# Altium PCB module_tester_v2.0.PcbDoc
Units mil, origin at the board's own origin, x right, y up, seen from the top; angles counter-clockwise.
Board outline 3671.45 x 2765.94 mil, 2 copper layers (Top Layer, Bottom Layer); 104 components, 83 nets, 395 pads, 151 vias.
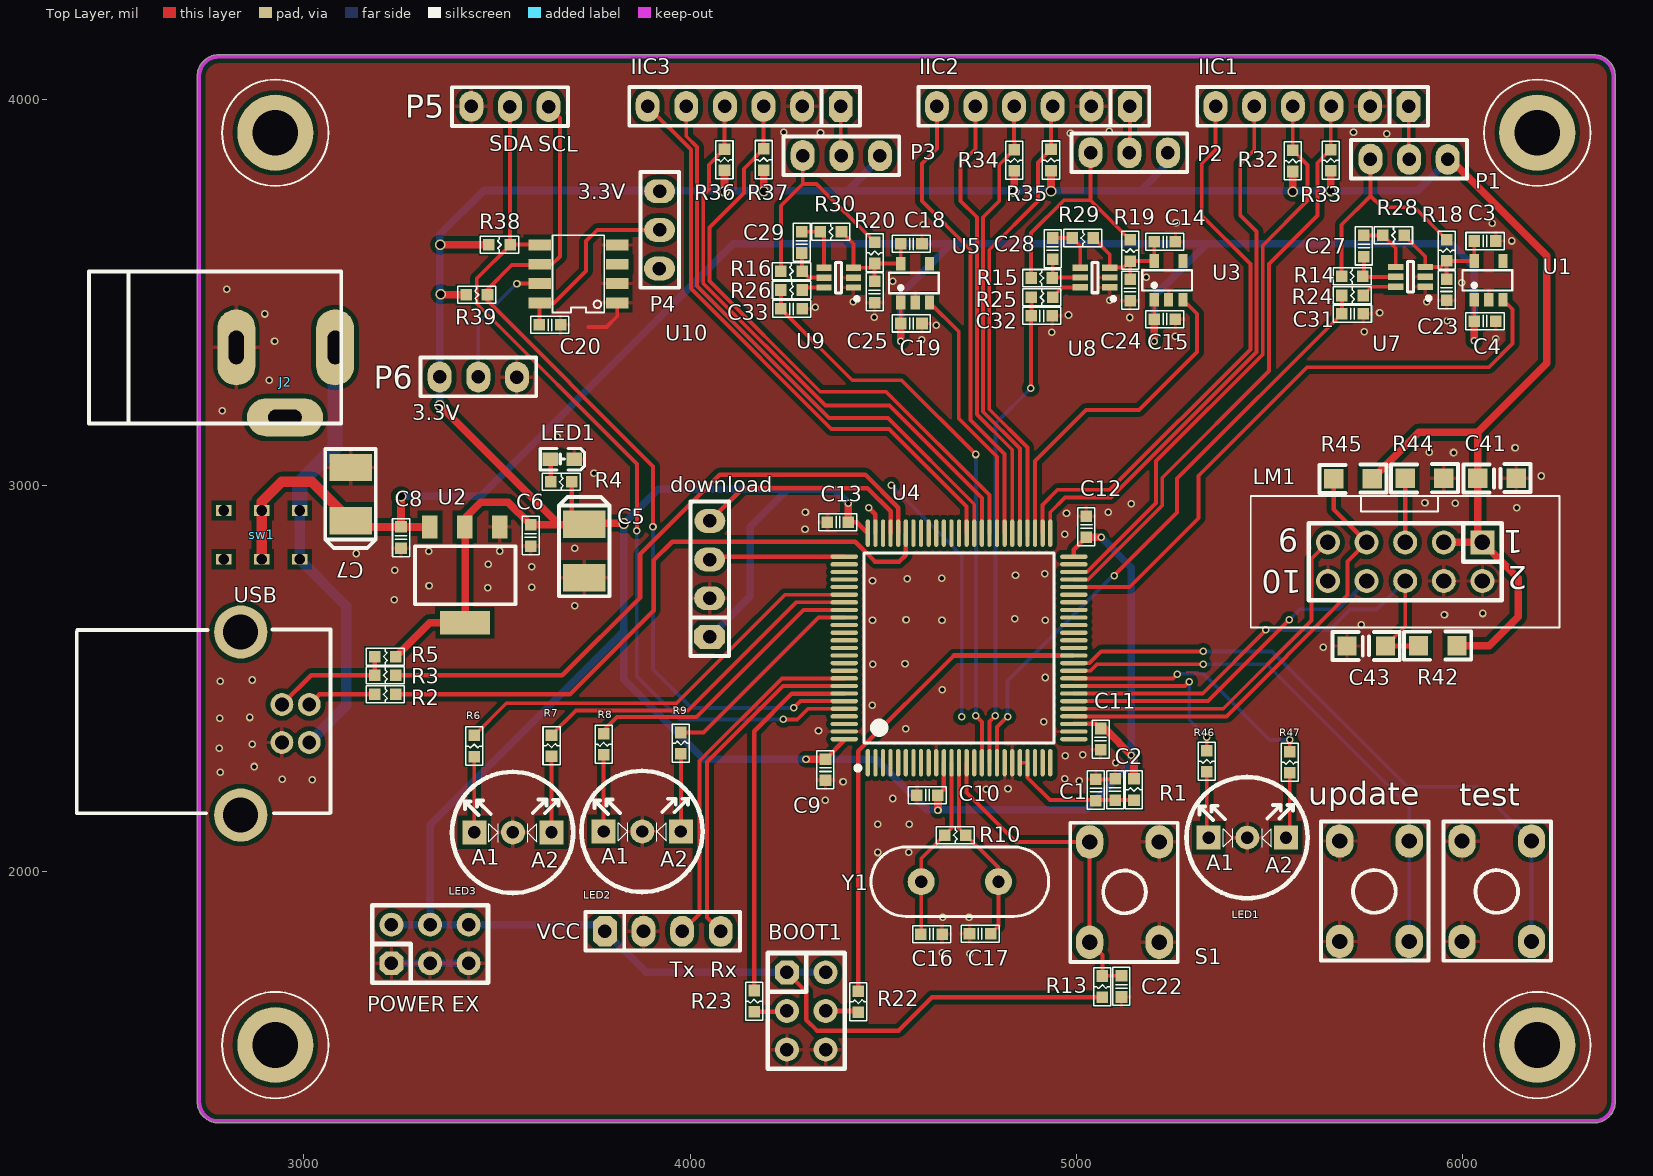
[diagram p0: Top Layer view]
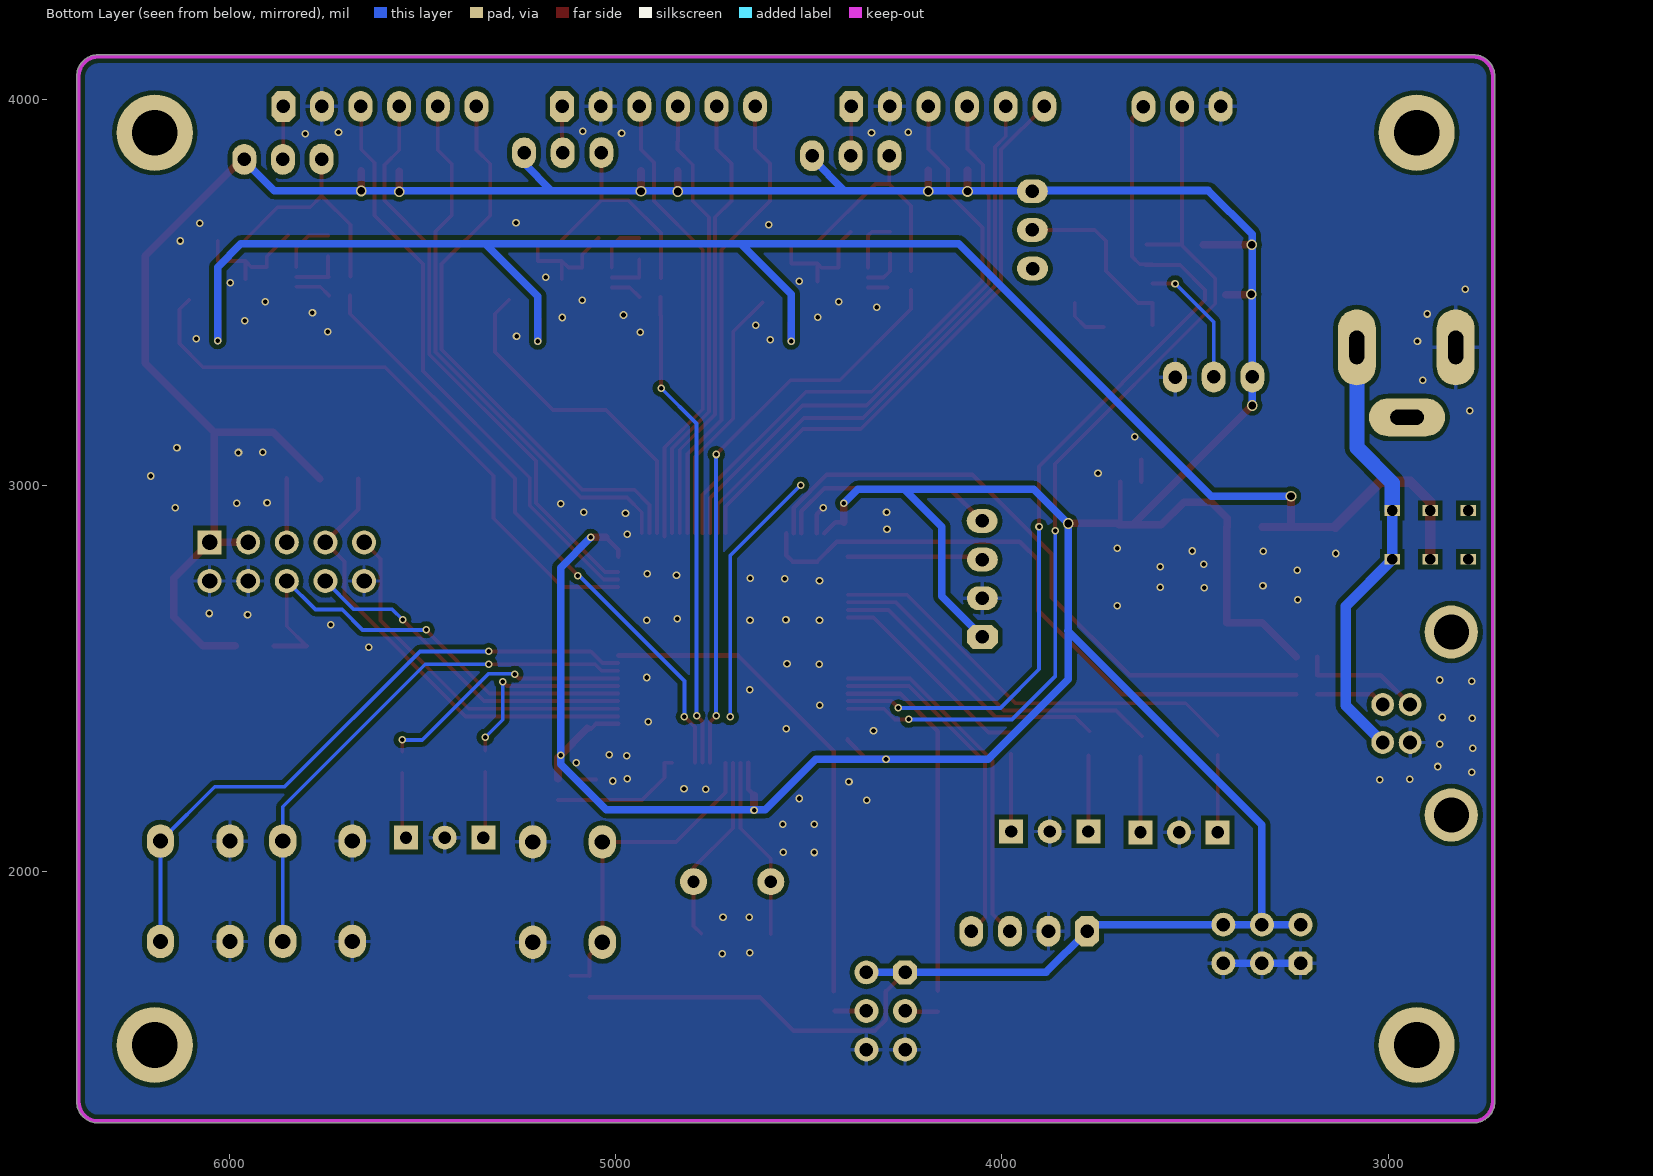
[diagram p1: Bottom Layer view, seen from below]

## Layer stack, top to bottom
Top Layer: signal copper 1.4
Dielectric: dielectric 12.6, FR-4, Dk 4.8
Bottom Layer: signal copper 1.4

## Board outline
2724.15,1404.95 2724.15,4029.44 cw(c2729.16,4029.44) 2724.2,4030.15 cw(c2729.16,4030.86) 2724.15,4030.86 2724.15,4060.86 cw(c2779.16,4060.86) 2779.16,4115.88 6340.58,4115.88 cw(c6340.58,4060.86) 6395.6,4060.86 6395.6,1404.95 cw(c6340.58,1404.95) 6340.58,1349.94 2779.16,1349.94 cw(c2779.16,1404.95)

## Design rules (kind name [scope] priority, off if disabled: settings)
AssemblyTestPointUsage [All] p1 off:
AssemblyTestpoint [All] p1 off: testpointundercomponent=TRUE minsize=40 maxsize=100 preferedsize=60 minholesize=0 maxholesize=40 preferedholesize=32 testpointgrid=1 usegrid=TRUE gridtolerance=0.01 allowsidetop=TRUE allowsidebottom=TRUE
Clearance Clearance_1 [(InPolygon)] p1: gap=11.81 // Protel DXP Scope 1 Expression Was: INPOLYGON
Clearance [All] p2: gap=6
ComponentClearance [All] p1 off: gap=10 collisioncheckmode=3 verticalgap=10 showdistances=FALSE
FabricationTestPointUsage [All] p1 off: valid=0 allowmultiple=FALSE
FabricationTestpoint [All] p1 off: side=3 testpointundercomponent=TRUE minsize=40 maxsize=100 preferedsize=60 minholesize=0 maxholesize=40 preferedholesize=32 testpointgrid=1 allowsidetop=TRUE allowsidebottom=TRUE usegrid=TRUE gridtolerance=0.01
FanoutControl Fanout_Small [All] p1 off: bgadir=Out bgaviamode=Centered fanoutstyle=Auto fanoutdirection=Alternating viagrid=1 // Protel DXP Scope 1 Expression Was: (CompPinCount < 5)   Fanout_Small (Default Rule)
FanoutControl Fanout_Default [All] p2: bgadir=Out bgaviamode=Centered fanoutstyle=Auto fanoutdirection=Alternating viagrid=1 // Fanout_Default (Default Rule)
FanoutControl Fanout_SOIC [All] p3 off: bgadir=Out bgaviamode=Centered fanoutstyle=Auto fanoutdirection=Alternating viagrid=1 // Protel DXP Scope 1 Expression Was: IsSOIC   Fanout_SOIC (Default Rule)
FanoutControl Fanout_BGA [All] p4 off: bgadir=Out bgaviamode=Centered fanoutstyle=Auto fanoutdirection=Alternating viagrid=1 // Protel DXP Scope 1 Expression Was: IsBGA   Fanout_BGA (Default Rule)
FanoutControl Fanout_LCC [All] p5 off: bgadir=Out bgaviamode=Centered fanoutstyle=Auto fanoutdirection=Alternating viagrid=1 // Protel DXP Scope 1 Expression Was: IsLCC   Fanout_LCC (Default Rule)
Height [All] p1 off: minheight=0 maxheight=1000 prefheight=500
HoleToHoleClearance [All] p1 off: gap=10 allowstackedmicrovias=TRUE
MinimumSolderMaskSliver [All] p1 off: minsoldermaskwidth=10
PasteMaskExpansion [All] p1 off: expansion=0
PlaneConnect [All] p1: planeconnectstyle=Direct reliefexpansion=20 reliefentries=4 reliefconductorwidth=10 reliefairgap=10
PolygonConnect [All vs IsVia AND InNet('GND')] p1: connectstyle=Direct reliefconductorwidth=10 reliefentries=4 polygonreliefangle="90 Angle" airgapwidth=10
PolygonConnect PolygonConnect_1 [All] p2: connectstyle=Relief reliefconductorwidth=10 reliefentries=4 polygonreliefangle="90 Angle" airgapwidth=10
RoutingVias [All] p1: holewidth=19.68 width=27.56 viastyle="Through Hole" minholewidth=0 minwidth=0 maxholewidth=196.85 maxwidth=196.85
SilkToSilkClearance [All] p1 off: silktosilkclearance=10
SilkscreenOverComponentPads [IsPad] p1 off: minsilkscreentomaskgap=10
SolderMaskExpansion [All] p1 off: expansion=4
Width [All] p1: maxlimit=100 minlimit=6 preferedwidth=11.81
11 further rules are at their usual default settings.

## Components (designator, comment, footprint, x,y, rotation, side; value= is the part's Value field where it differs from the comment)
BOOT1 "Header 3X2" IDC6_1 4250.93,1739.96 r270 top
C1 "Cap" C0603E 5051.02,2184.65 r90 top
C2 "Cap" C0603E 5100.96,2185.76 r90 top
C3 "Cap Pol2" C0603E 6031.05,3633.67 r0 top
C4 "Cap" C0603E 6030.94,3426 r0 top
C5 "Cap Pol2" C3528 3725.77,2899.95 r270 top
C6 "Cap" C0603E 3587.43,2843.68 r90 top
C7 "Cap Pol2" C3528 3121.26,2909.53 r90 top
C8 "Cap" C0603E 3251.6,2838.34 r90 top
C9 "Cap" C0603E 4350.68,2237.23 r90 top
C10 "Cap" C0603E 4586.93,2198.85 r0 top
C11 "Cap" C0603E 5062.99,2316.43 r90 top
C12 "Cap" C0603E 5026.01,2921.53 r270 top
C13 "Cap" C0603E 4355.14,2905.52 r0 top
C14 "Cap Pol2" C0603E 5201.87,3631.31 r0 top
C15 "Cap" C0603E 5201.87,3431.28 r0 top
C16 "Cap" C0603E 4597.88,1839.11 r0 top
C17 "Cap" C0603E 4778.73,1840.12 r180 top
C18 "Cap Pol2" C0603E 4545.67,3626.11 r0 top
C19 "Cap" C0603E 4545.67,3420.14 r0 top
C20 "Cap" C0603E 3664.73,3416.5 r180 top (schematic designator C8)
C22 "Cap" C0603E 5117.1,1676.14 r90 top
C23 "104" C0603E 5959.18,3480.12 r90 top
C24 "104" C0603E 5139.39,3479.18 r90 top
C25 "104" C0603E 4478.08,3474.3 r90 top
C27 "Cap" C0603E 5744.96,3593.34 r90 top
C28 "Cap" C0603E 4939.18,3586.52 r90 top
C29 "Cap" C0603E 4289.42,3602.55 r90 top
C31 "102" C0603E 5687.81,3445.22 r0 top
C32 "102" C0603E 4883.17,3439.72 r0 top
C33 "102" C0603E 4235.32,3457.85 r0 top
C41 "10uF" C0805 6139.31,3019.19 r180 top
C43 "104" C0805 5700.96,2585.08 r0 top
download "Header 4H" header4 4050.75,2612.32 r90 top
IIC1 "MHDR1X6" header6 5861.27,3982.17 r180 top
IIC2 "MHDR1X6" header6 5139.46,3982.17 r180 top
IIC3 "MHDR1X6" header6 4390.65,3982.17 r180 top
J2 "PWR2.5" DC-POWER 3080.99,3358.29 r180 top
LED1 "" LED-2C-KV 5343.03,2088.83 r0 top
LED1 "LED-RED-0603" LED0603 3637.56,3068.68 r0 top
LED2 "" LED-2C-KV 3776.33,2104.81 r0 top
LED3 "" LED-2C-KV 3441.31,2102.31 r0 top
LM1 "HEADER2*5" IDC10 6051.84,2853.29 r180 top
P1 "Header 3" header3 5913.71,3839.26 r180 top
P2 "Header 3" header3 5189.19,3856.21 r180 top
P3 "Header 3" header3 4443.57,3848.63 r180 top
P4 "Header 3" header3 3927.23,3714.3 r270 top
P5 "Header 3" header3 3585.35,3975.93 r180 top
P6 "Header 3" header3 3399.87,3287.59 r0 top
"POWER EX" "Header 3X2A" IDC6 3226.79,1763.5 r0 top
R1 "Res2" R0603E 5149.49,2185.81 r90 top
R2 "Res2" R0603E 3183.27,2459.57 r0 top
R3 "Res2" R0603E 3183.36,2509.21 r0 top
R4 "Res2" R0603E 3638.85,3009.84 r0 top
R5 "Res2" R0603E 3183.45,2557.65 r0 top
R6 "Res2" R0603E 3441.07,2353.56 r270 top
R7 "Res2" R0603E 3641.31,2299.09 r90 top
R8 "Res2" R0603E 3776.19,2358.03 r270 top
R9 "Res2" R0603E 3976.33,2306.06 r90 top
R10 "Res2" R0603E 4659.12,2095.48 r0 top
R13 "Res2" R0603E 5067.71,1730.6 r270 top
R14 "Res2" R0603E 5742.24,3542.19 r180 top
R15 "Res2" R0603E 4938.3,3537.9 r180 top
R16 "Res2" R0603E 4290.21,3555.49 r180 top
R18 "Res2" R0603E 5959.44,3637.12 r270 top
R19 "Res2" R0603E 5139.86,3636.74 r270 top
R20 "Res2" R0603E 4478.47,3630.4 r270 top
R22 "Res2" R0603E 4435.95,1636.4 r90 top
R23 "Res2" R0603E 4165.79,1692.9 r270 top
R24 "100R" R0603E 5687.73,3492.63 r0 top
R25 "100R" R0603E 4883.71,3488.3 r0 top
R26 "100R" R0603E 4235.28,3506.85 r0 top
R28 "Res2" R0603E 5793.97,3648.49 r0 top
R29 "Res2" R0603E 4989.42,3641.49 r0 top
R30 "Res2" R0603E 4337.27,3657.47 r0 top
R32 "Res2" R0603E 5560.55,3868.73 r270 top
R33 "Res2" R0603E 5659.11,3870.48 r270 top
R34 "Res2" R0603E 4839.84,3870.22 r270 top
R35 "Res2" R0603E 4934.65,3870.88 r270 top
R36 "Res2" R0603E 4089.21,3871.53 r270 top
R37 "Res2" R0603E 4190.57,3872.19 r270 top
R38 "Res2" R0603E 3534.07,3624.01 r180 top
R39 "Res2" R0603E 3475.49,3494.53 r180 top
R42 "10K" R0805 5985.89,2585.98 r180 top
R44 "300R" R0805 5951.5,3019.18 r180 top
R45 "0" R0805 5766.27,3018.16 r180 top
R46 "Res2" R0603E 5338.1,2314.05 r270 top
R47 "Res2" R0603E 5552.94,2311.43 r270 top
S1 "RESET" key6X6#1 5034.8,2077.86 r270 top
sw1 "switch-power" switch-power 2891.03,2935.86 r270 top
test "test_key" key6X6#1 6179.02,1819.82 r90 top (schematic designator S2)
U1 "HH7233M" SOT-23-5 6030.66,3481.37 r90 top
U2 "AMS1117-3.3V" SOT-223 3507.6,2893.19 r180 top
U3 "HH7233M" SOT-23-5 5201.87,3481.53 r90 top
U4 "STM32F103VCT6" LC-LQFP-100_14x14x05P 4696.54,2580.04 r0 top
U5 "HH7233M" SOT-23-5 4545.67,3474.71 r90 top
U7 "INA199" LC-SC-70-6(SOT-363) 5865.49,3540.85 r0 top
U8 "INA199" LC-SC-70-6(SOT-363) 5048.7,3539.09 r0 top
U9 "INA199" LC-SC-70-6(SOT-363) 4384.87,3538.82 r0 top
U10 "24C512" SOP8/150mil 3706.78,3545.64 r180 top
update "update_key" key6X6#2 5770.55,1950.26 r90 top (schematic designator S3)
USB "USB" USB-B 3014.07,2335.08 r90 top
VCC "Header 4" header4 3783.08,1846.62 r0 top (schematic designator USART1)
Y1 "8MHZ" CRY1 4703.6,1964.77 r0 top

## Footprints (in the part's own frame and the unit in brackets; to place one, negate y for a bottom-side part, rotate by r counter-clockwise, add the part's x,y. Pads: shape width x height; smd on the part's side, far side on the other; paste and mask are expansions set on the pad)
C0603E [mil]
  rect 30x30 smd: 1(0,0) 2(55,0)
  silkscreen extent -22,-22 77,22
C0805 [mil]
  rect 50x50 smd: 1(0,0) 2(99.71,0)
  silkscreen extent -37,-37 137,37
C3528 [mm]
  rect 1.8x2.8 smd: 1(0,0) 2(3.5,0)
  silkscreen extent -1.81,-1.65 4.72,1.68
CRY1 [mil]
  round 70 hole 32: 1(-105,10) 2(95,10)
  silkscreen extent -235,-80 225,100
DC-POWER [mm]
  oval 2.5x5 hole 1 slot 2.2 at 90 deg: 1(6.5,0) 2(0,0)
  oval 5x2.5 hole 1 slot 2.2 at 0 deg: 3(3.3,4.6)
  silkscreen extent -0.4,-5 16.2,5
header3 [mil]
  oval 62x80 hole 35: 1(-48.2,-5.9) 2(51.8,-5.9) 3(151.8,-6.4)
  silkscreen extent -98,-56 202,44
header4 [mil]
  oct 62x80 hole 35: 1(-3.59,-0.1)
  oval 62x80 hole 35: 2(96.41,-0.1) 3(196.41,-0.1) 4(296.41,-0.59)
  silkscreen extent -54,-50 346,50
header6 [mil]
  oct 62x80 hole 35: 1(0.41,-0.1)
  oval 62x80 hole 35: 2(100.41,-0.1) 3(200.41,-0.1) 4(300.41,-0.1) 5(400.41,-0.1) 6(500.41,-0.1)
  silkscreen extent -50,-50 548,50
IDC6 [mil]
  oct 62x62 hole 35: 1(0,0)
  round 62 hole 35: 2(100,0) 3(200,0) 4(0,100) 5(100,100) 6(200,100)
  silkscreen extent -50,-50 250,150
IDC6_1 [mil]
  oct 62x62 hole 35: 1(0,0)
  round 62 hole 35: 2(0,100) 3(100,0) 4(100,100) 5(200,0) 6(200,100)
  silkscreen extent -50,-50 250,150
IDC10 [mil]
  rect 62x62 hole 40: 1(0,0)
  round 62 hole 40: 2(0,100) 3(100,0) 4(100,100) 5(200,0) 6(200,100) 7(300,0) 8(300,100) 9(400,0) 10(400,100)
  silkscreen extent -200,-120 600,220
key6X6#1 [mm]
  oval 2.2x1.8 hole 1: 1(0,0) 1(6.604,0) 2(0,4.572) 2(6.604,4.572)
  silkscreen extent -1.26,-1.28 7.89,5.79
key6X6#2 [mm]
  oval 2.2x1.8 hole 1: 1(-3.308,-2.327) 1(3.296,-2.327) 2(-3.308,2.245) 2(3.296,2.245)
  silkscreen extent -4.57,-3.61 4.58,3.47
LC-LQFP-100_14x14x05P [mm]
  oval 0.28x1.8 smd mask+0.051: 1(-6,-7.55) 2(-5.5,-7.55) 3(-5,-7.55) 4(-4.5,-7.55) 5(-4,-7.55) 6(-3.5,-7.55) 7(-3,-7.55) 8(-2.5,-7.55) 9(-2,-7.55) 10(-1.5,-7.55) 11(-1,-7.55) 12(-0.5,-7.55) 13(0,-7.55) 14(0.5,-7.55) 15(1,-7.55) 16(1.5,-7.55) 17(2,-7.55) 18(2.5,-7.55) 19(3,-7.55) 20(3.5,-7.55) 21(4,-7.55) 22(4.5,-7.55) 23(5,-7.55) 24(5.5,-7.55) 25(6,-7.55) 51(6,7.55) 52(5.5,7.55) 53(5,7.55) 54(4.5,7.55) 55(4,7.55) 56(3.5,7.55) 57(3,7.55) 58(2.5,7.55) 59(2,7.55) 60(1.5,7.55) 61(1,7.55) 62(0.5,7.55) 63(0,7.55) 64(-0.5,7.55) 65(-1,7.55) 66(-1.5,7.55) 67(-2,7.55) 68(-2.5,7.55) 69(-3,7.55) 70(-3.5,7.55) 71(-4,7.55) 72(-4.5,7.55) 73(-5,7.55) 74(-5.5,7.55) 75(-6,7.55)
  oval 1.8x0.28 smd mask+0.051: 26(7.55,-6) 27(7.55,-5.5) 28(7.55,-5) 29(7.55,-4.5) 30(7.55,-4) 31(7.55,-3.5) 32(7.55,-3) 33(7.55,-2.5) 34(7.55,-2) 35(7.55,-1.5) 36(7.55,-1) 37(7.55,-0.5) 38(7.55,0) 39(7.55,0.5) 40(7.55,1) 41(7.55,1.5) 42(7.55,2) 43(7.55,2.5) 44(7.55,3) 45(7.55,3.5) 46(7.55,4) 47(7.55,4.5) 48(7.55,5) 49(7.55,5.5) 50(7.55,6) 76(-7.55,6) 77(-7.55,5.5) 78(-7.55,5) 79(-7.55,4.5) 80(-7.55,4) 81(-7.55,3.5) 82(-7.55,3) 83(-7.55,2.5) 84(-7.55,2) 85(-7.55,1.5) 86(-7.55,1) 87(-7.55,0.5) 88(-7.55,0) 89(-7.55,-0.5) 90(-7.55,-1) 91(-7.55,-1.5) 92(-7.55,-2) 93(-7.55,-2.5) 94(-7.55,-3) 95(-7.55,-3.5) 96(-7.55,-4) 97(-7.55,-4.5) 98(-7.55,-5) 99(-7.55,-5.5) 100(-7.55,-6)
  silkscreen extent -6.8,-8.05 6.25,6.25
LC-SC-70-6(SOT-363) [mm]
  rect 1x0.42 smd mask+0.051: 1(0.97,-0.65) 2(0.97,0) 3(0.97,0.65) 4(-0.97,0.65) 5(-0.97,0) 6(-0.97,-0.65)
  silkscreen extent -0.2,-1.52 1.33,1
LED0603 [mil]
  rect 40x35 smd: A(0,0) K(62.27,0)
  silkscreen extent -25,-28 89,27
LED-2C-KV [mil]
  rect 62x62 hole 32: A1(0,0) A2(200,0)
  round 62 hole 32: K(100,0)
  silkscreen extent -58,-157 256,157
R0603E [mil]
  rect 30x30 smd: 1(0,0) 2(55,0)
  silkscreen extent -22,-22 77,22
R0805 [mil]
  rect 50x50 smd: 1(0,0) 2(99.71,0)
  silkscreen extent -37,-37 137,37
SOP8/150mil [mm]
  rect 1.5x0.72 smd: 1(-2.657,1.831) 2(-2.657,0.561) 3(-2.657,-0.709) 4(-2.657,-1.979) 5(2.443,-1.979) 6(2.443,-0.709) 7(2.443,0.561) 8(2.443,1.831)
  silkscreen extent -1.81,-2.61 1.59,2.47
SOT-23-5 [mm]
  rect 0.9x0.6 smd: 1(0,0) 2(0,-0.95) 3(0,-1.9) 4(2.55,-1.9) 5(2.55,0)
  silkscreen extent 0.61,-2.49 1.95,0.78
SOT-223 [mil]
  rect 40x60 smd: 1(0,0) 2(90.55,0) 3(181.1,0)
  rect 130x60 smd: 4(90,248)
  silkscreen extent -40,50 220,200
switch-power [mm]
  rect 0.7x1 hole 0.7: 1(0,2.5) 2(0,0) 3(0,-2.5) 4(3.2,2.5) 5(3.2,0) 6(3.2,-2.5)
USB-B [mm]
  round 1.5 hole 0.9: 1(0,0) 2(2.5,0) 3(2.5,1.8) 4(0,1.8)
  round 3.5 hole 2.3: 5(7.27,4.51) 6(-4.77,4.51)
  silkscreen extent -4.65,-1.4 7.44,15.29

## Part data
BOOT1 "POWER EX": "Header, 3-Pin, Dual row"
C1 C2 C4 C6 C8 C9 C10 C11 C12 C13 C15 C16 C17 C19 C20 C22 C27 C28 C29: "Capacitor"
C3 C5 C7 C14 C18: "Polarized Capacitor (Axial)"
C23 C24 C25 C31 C32 C33 C41 C43: library part "Cap Semi", "Capacitor (Semiconductor SIM Model)"
download: "Header, 4-Pin, Right Angle"
IIC1 IIC2 IIC3: "Header, 6-Pin"
J2: "Low Voltage Power Supply Connector"
LED1: library part LED-0603
P1 P2 P3 P4 P5 P6: "Header, 3-Pin"
R1 R2 R3 R4 R5 R6 R7 R8 R9 R10 R13 R14 R15 R16 R18 R19 R20 R22 R23 R28 R29 R30 R32 R33 R34 R35 R36 R37 R38 R39 R46 R47: "Resistor"
R24 R25 R26: library part R
R42 R44 R45: library part Res2, "Resistor"
S1 test update: library part SW-PB, "Switch"
U1 U3 U5: library part HH72XXM
U2: library part LM317MSTT3, "Three-Terminal Adjustable Output Positive Voltage Regulator"
U4: library part STM32F407ZET6
U10: library part AD8400
VCC: "Header, 4-Pin"
Y1: library part XTAL, "Crystal Oscillator"

## Free pads (board coordinates)
  round 196.85 hole 118.11: 0(2926.01,1551.8) 0(2926.01,3914.01) 0(6193.73,1551.8) 0(6193.73,3914.01)

## Via types
v1: diameter 19.68, hole 11.81, Top Layer to Bottom Layer, 140 vias
v2: diameter 27.56, hole 19.68, Top Layer to Bottom Layer, 11 vias

## Nets (pads, with @x,y where several pads share a name; then routed paths per layer and width w, separated by ;. In a path a pad name is that pad's centre, name@x,y a point inside that pad or via, vN(x,y) a via of type N, cw(c..) or ccw(c..) an arc to the next point about the centre after c; other vN are vias at no path point)
+3.3V: "POWER EX.4" "POWER EX.5" "POWER EX.6" BOOT1.1 BOOT1.2 C5.1 C6.2 C9.2 C10.2 C11.2 C12.2 C13.2 C41.2 download.1 LM1.1 LM1.3 P1.1 P2.1 P3.1 P4.1 P6.1 R1.2 R4.2 R5.2 R13.2 R32.2 R33.2 R34.2 R35.2 R36.2 R37.2 R38.2 R39.2 R42.1 R45.1 U2.2 U2.4 U4.11 U4.28 U4.50 U4.75 U4.100 VCC.1 | length 14807.4
  Top Layer w11.81: C5.1@3693.19,2902.44 R4.2@3693.19,3009.84 ; BOOT1.1 4300.4,1690.49 4300.4,1617.66 4328.78,1589.28 4540.25,1589.28 4626.57,1675.6 R13.2 ; C9.2 4399.3,2340.85 U4.100 ; C13.2 4432.08,2905.52 U4.75 ; C10.2 4657.17,2214.09 U4.11 ; U4.28 5051.23,2383.19 C11.2 C11.2@5073.77,2371.43 ; U4.50 4993.78,2834.3 C12.2
  Top Layer w19.68: R5.2 3325.99,2645.19 U2.4 3417.6,2892.64 U2.2 3417.05,2916.02 3458.54,2957.51 3528.6,2957.51 C6.2 C5.1@3696.95,2898.68 ; v2@3351.24,3494.53 R39.2 ; v2(3352.27,3207.9) 3657.73,2902.44 ; v2(3353.44,3624.01) R38.2 ; C5.1@3701.04,2902.77 v2@3828.8,2902.77 ; v2(4089.21,3762.07) R36.2 ; v2(4190.57,3762.92) R37.2 ; v1(4300.27,2292.23) C9.2 ; C13.2 v1(4410.14,2954.77) ; v1(4641.93,2159.99) C10.2 ; v2(4839.84,3761.82) R34.2 ; v2(4934.65,3762.52) R35.2 ; C12.2 v1(5064.98,2866.52) ; C11.2@5073.77,2371.43 5149.49,2295.71 R1.2 ; v2(5560.55,3761.48) R32.2 ; v2(5659.11,3763.37) R33.2 ; R45.1 5886.76,3138.65 6039.6,3138.65 ; LM1.3 LM1.1@6039.6,2853.29 ; P1.1 5968.27,3845.16 6218.44,3594.99 6218.44,3317.49 6039.6,3138.65 ; R42.1 6069.93,2585.98 6144.98,2661.03 6144.98,2760.15 LM1.1 ; LM1.1@6039.6,2865.53 C41.2 6039.6,3138.65
  Bottom Layer w19.68: 3226.79,1863.5 3326.79,1863.5 ; v2(3352.27,3207.9) 3352.27,3650.72 3465.97,3764.42 P4.1@3892.53,3764.42 ; v2@3826.21,2899.14 3917.99,2990.92 4253.03,2990.92 ; v2(3828.8,2902.11) 3828.8,2498.94 4036.06,2291.68 4482.36,2291.68 4612.88,2161.16 5024.44,2161.16 5142.48,2279.2 v1@5142.48,2302.26 ; 3829.04,2624.06 3326.79,2121.81 3326.79,1863.5 ; P4.1@3886.56,3764.11 4408.3,3764.11 ; download.1 4156.06,2713.94 4156.06,2893.95 4253.03,2990.92 ; BOOT1.2 BOOT1.1 3886.05,1739.96 VCC.1 3762.51,1863.5 3426.79,1863.5 3326.79,1863.5 ; v1@4406.76,2957.4 4373.24,2990.92 4253.03,2990.92 ; P3.1 4491.77,3847.58 4408.3,3764.11 ; v1@5065.49,2865.27 5142.95,2787.81 v1(5142.95,2302.01) ; P2.1 5237.39,3834.58 5166.92,3764.11 ; P1.1@5959.24,3839.02 5884.33,3764.11 5166.92,3764.11 ; 4408.3,3764.11 5166.92,3764.11
  other v2: 3354.8,3496.15
+5VCC: C4.1 C7.1 C8.2 C15.1 C19.1 sw1.2 sw1.5 U1.1 U2.3 U3.1 U5.1 | length 4930.4
  Top Layer w10: C19.1 U5.1 ; C15.1 U3.1 ; C4.1@6030.66,3426.28 U1.1
  Top Layer w19.68: C7.1@3136.69,2893.99 3137.49,2893.19 U2.3 ; C8.2 v2(3251.6,2972.62) ; v1(4545.67,3374.19) C19.1 ; v1(5201.87,3373.64) C15.1 ; v1(6030.94,3375.02) C4.1
  Top Layer w27.56: sw1.5@2890.57,2808.82 2890.57,2958.4 2942.45,3010.28 3020.4,3010.28 C7.1@3136.69,2893.99
  Bottom Layer w19.68: v2(3251.6,2972.62) 3458.48,2972.62 4112.24,3626.38 4676.04,3626.38 ; v1(4545.67,3374.19) 4545.67,3496.01 4676.04,3626.38 ; v1(5201.87,3373.64) 5201.87,3490.82 5337.43,3626.38 ; v1(6030.94,3375.02) 6030.94,3565.92 5970.48,3626.38 5337.43,3626.38 ; 4676.04,3626.38 5337.43,3626.38
AD1: C31.1 R24.1 U4.18 | length 1585.7
  Top Layer w10: U4.18 4794.97,2374.99 v1(4822.3,2402.31) ; v1(5097.96,2767.17) 5261.12,2930.33 5261.12,3018.53 C31.1 ; C31.1@5687.73,3445.3 R24.1
  Bottom Layer w10: v1(4822.3,2402.31) 4822.3,2494.55 5097.96,2770.21 v1(5097.96,2767.17)
AD2: C32.1 R25.1 U4.17 | length 1246.9
  Top Layer w10: U4.17 4775.28,2389.36 v1(4790.48,2404.56) ; v1@4883.17,3254.77 C32.1 ; C32.1@4883.71,3440.26 R25.1
  Bottom Layer w10: v1(4790.48,2404.56) 4790.48,3160.81 v1(4882.1,3252.43)
AD3: C33.1 R26.1 U4.16 | length 1514.4
  Top Layer w10: C33.1 4420.01,3273.16 4547.9,3273.16 v1(4740.01,3081.02) ; C33.1@4235.28,3457.89 R26.1 ; v1(4740.01,2404.06) 4755.6,2388.47 U4.16
  Bottom Layer w10: v1(4740.01,2404.06) v1(4740.01,3081.02)
BOOT0: R23.1 U4.94 | length 945.5
  Top Layer w11.81: R23.1 4165.79,2364.63 4263.09,2461.93 U4.94
BOOT1: R22.2 U4.37 | length 1281.9
  Top Layer w11.81: R22.2 4435.95,2312.98 4683.33,2560.36 U4.37
CE1: U1.3 U4.46 | length 1585.1
  Top Layer w10: U4.46 5138.46,2737.52 5316.74,2915.8 5316.74,3025.91 5597.78,3306.95 6068.6,3306.95 6129.92,3368.27 6129.92,3456.91 U1.3
CE2: U3.3 U4.53 | length 873.8
  Top Layer w10: U4.53 4893.39,3064.48 5025.01,3196.1 5162.86,3196.1 5312.99,3346.23 5312.99,3445.21 U3.3
CE3: U4.58 U5.3 | length 669.7
  Top Layer w10: U5.3 4695.65,3399.53 4695.65,3174.42 4794.97,3075.1 U4.58
DRDY1: IIC1.5 U4.51 | length 1428.2
  Top Layer w10: U4.51 4932.76,2931.31 4970.86,2969.41 5089.74,2969.41 5466.87,3346.54 5466.87,3658.19 5424.87,3700.19 5424.87,3833.82 5460.86,3869.81 IIC1.5
DRDY2: IIC2.5 U4.56 | length 1176.3
  Top Layer w10: IIC2.5 4739.05,3872.59 4700.65,3834.19 4700.65,3737.19 4742.65,3695.19 4742.65,3184.94 4834.34,3093.25 U4.56
DRDY3: IIC3.5 U4.61 | length 1503.2
  Top Layer w10: IIC3.5 3990.24,3904.9 4018.22,3876.92 4018.22,3517.15 4359.88,3175.49 4512.36,3175.49 4735.91,2951.94 U4.61
GND: "POWER EX.1" "POWER EX.2" "POWER EX.3" BOOT1.5 BOOT1.6 C1.2 C2.2 C3.2 C4.2 C5.2 C6.1 C7.2 C8.1 C9.1 C10.1 C11.1 C12.1 C13.1 C14.2 C15.2 C16.2 C17.2 C18.2 C19.2 C20.1 C22.1 C23.1 C24.1 C25.1 C31.2 C32.2 C33.2 C41.1 C43.1 download.2 IIC1.2 IIC2.2 IIC3.2 J2.1 LED1.K LED2.K LED3.K LM1.2 LM1.4 LM1.10 P5.3 P6.3 R44.1 S1.2 test.2 U1.2 U2.1 U3.2 U4.10 U4.19 U4.20 U4.27 U4.49 U4.74 U4.99 U5.2 U7.1 U7.2 U8.1 U8.2 U9.1 U9.2 U10.1 U10.2 U10.4 update.2 USB.4 VCC.2 | length 442.1
  Top Layer w10: 3736.45,3411.17 3783.6,3411.17 3811.37,3438.94 U10.1 ; C1.2 C2.2@5099.85,2239.65
  Top Layer w11.81: v1(4463.19,2942.54) 4480,2925.73 U4.74
  Bottom Layer w19.68: 3226.79,1763.5 3326.79,1763.5 3426.79,1763.5
  other v1: 4723.88,1787.85 4652.55,1790.92 4654.85,1882.95 4722.35,1882.96 4485.67,2050.4 4566.82,2050.91 4567.34,2123.39 4485.67,2123.9 4350.46,2185.73 4524.88,2190.1 4766.5,2214.51 4823.32,2215.9 4396.16,2233.28 5008.09,2235.42 3022.13,2238.94 2944.13,2239.74 4970.44,2241 2783.35,2257.61 2871.65,2272.92 5102.12,2282.95 4971.84,2300.97 5017.16,2303.76 2781.3,2319.88 2866.55,2331.11 4332.55,2365.34 4558.67,2370.37 4916.03,2389.39 2781.81,2397.46 2860.42,2400.01 4471.58,2431.56 4653.11,2471.6 2783.86,2493.94 2866.55,2497 4919.43,2503.53 4473.38,2538.26 4556.58,2539.17 5639.42,2581.71 5737.56,2640.25 4472.48,2651.29 4652.43,2652.2 4919.43,2651.64 4559.29,2653.11 4841.3,2655.71 5953.5,2665.69 6052.96,2669.31 3701.97,2689.01 3234.22,2705 3476.45,2736.33 3590.6,2736.81 3324.16,2741.25 4472.42,2753.55 4562,2758.9 4651.52,2760.71 4842.66,2767.82 4918.75,2772.57 3235.61,2781 3589.67,2790.62 3477.38,2796.66 3136.09,2824.53 3323.12,2830.16 3507.08,2831 3701.04,2838.42 4970.5,2874.81 4297.69,2887.01 4974.72,2928.4 4298.84,2931.1 5083.13,2931.34 6140.84,2942.56 5142.19,2953.7 5981.08,2954.3 5902.98,2956.34 6204.13,3025.25 3751.25,3032.6 5913.7,3086.48 5977,3085.99 6136.25,3098.24 3655.77,3126.93 2788.49,3194.6 2910.33,3272.94 2924.11,3373.75 4600.15,3377.86 6086.02,3380.48 5256.91,3386.62 4936.76,3397.12 5745.47,3398.41 4637.1,3415.85 5961.22,3427.03 5138.79,3435.58 4477.43,3436.78 4979.91,3442.13 2898.73,3444.82 5785.36,3448.36 4323.86,3462.46 4423.04,3476.18 5907.87,3476.18 5086.81,3480.26 2800.82,3508.64 5998.22,3525.72 4524.5,3529.86 5181.76,3539.58 6127.32,3633.83 4603.46,3676.04 6077.35,3679.31 5258.27,3680.57 5803.77,3911.38 4985.04,3913.14 4337.73,3914.07 4242.6,3915 5717.92,3915.71 5085.27,3918.24
LCD_CLK: LM1.9 U4.30 | length 930
  Top Layer w10: U4.30 5380.73,2422.56 5609.45,2651.28 5609.45,2810.9 LM1.9
LCD_CS: LM1.7 R45.2 U4.29 | length 1196
  Top Layer w10: U4.29 5388.88,2402.87 5702.63,2716.62 5702.63,2804.08 LM1.7
  Top Layer w11.81: R45.2 5666.56,2938.57 LM1.7
LCD_DA: LM1.8 U4.31 | length 890
  Top Layer w10: U4.31 5341.07,2442.24 v1@5553.97,2655.14
  Bottom Layer w10: v1(5551.74,2652.9) 5579.05,2680.21 5678.76,2680.21 LM1.8
LCD_RST: C43.2 LM1.6 R42.2 U4.32 | length 1253.2
  Top Layer w10: U4.32 5327.59,2461.93 v1@5491.84,2626.18 ; C43.2 5851.84,2636.25 LM1.6
  Top Layer w11.81: C43.2 R42.2@5885.28,2585.08
  Bottom Layer w10: v1(5491.1,2626.92) 5655.76,2626.92 5708.18,2679.34 5777.89,2679.34 LM1.6
LED1: R6.1 U4.81 | length 1109.1
  Top Layer w10: R6.1 3524.15,2436.64 3964.65,2436.64 4245.85,2717.84 U4.81
LED2: R7.2 U4.82 | length 905.1
  Top Layer w10: R7.2@3637.75,2351.46 3704.32,2418.03 3994.39,2418.03 4274.51,2698.15 U4.82
LED3: R8.1 U4.83 | length 756.2
  Top Layer w10: R8.1@3773.27,2364.14 3810.52,2401.39 4016.59,2401.39 4293.67,2678.47 U4.83
LED4: R9.2 U4.84 | length 546.3
  Top Layer w10: R9.2 4034.9,2361.06 4332.62,2658.78 U4.84
LED5: R46.1 U4.33 | length 500.4
  Top Layer w10: U4.33 5282.06,2481.61 v1(5292.71,2492.26) ; R46.1 v1(5338.1,2348.71)
  Bottom Layer w10: v1(5292.71,2492.26) 5292.71,2394.1 v1(5338.1,2348.71)
LED6: R47.1 U4.34 | length 665.4
  Top Layer w10: U4.34 5250.34,2501.3 v1(5261.12,2512.07) ; R47.1 v1(5552.94,2341.92)
  Bottom Layer w10: v1(5261.12,2512.07) 5262.15,2513.1 5329.77,2513.1 5500.95,2341.92 v1(5552.94,2341.92)
LED7: 
LED8: 
LED11: LED3.A1 R6.2 | length 200
  Top Layer w10: LED3.A1 R6.2@3441.31,2302.33
LED22: LED3.A2 R7.1 | length 196.8
  Top Layer w10: LED3.A2 R7.1
LED33: LED2.A1 R8.2 | length 197
  Top Layer w10: LED2.A1 R8.2@3776.33,2301.78
LED44: LED2.A2 R9.1 | length 201.3
  Top Layer w10: LED2.A2 R9.1
LED55: LED1.A1 R46.2 | length 165.3
  Top Layer w10: LED1.A1@5338.1,2093.76 R46.2
LED66: LED1.A2 R47.2 | length 171.7
  Top Layer w10: LED1.A2 5552.94,2098.74 R47.2
NetBOOT1_3: BOOT1.3 R23.2 | length 83.1
  Top Layer w11.81: R23.2 BOOT1.3@4248.87,1637.9
NetBOOT1_4: BOOT1.4 R22.1 | length 81.5
  Top Layer w11.81: BOOT1.4 R22.1@4432.39,1639.96
NetC27_1: C27.1 R14.1 U7.5 | length 132.2
  Top Layer w10: R14.1@5743.58,3540.85 U7.5 ; R14.1@5744.96,3544.91 C27.1
NetC27_2: C27.2 R28.1 U7.4 | length 144.7
  Top Layer w10: C27.2 R28.1@5793.82,3648.34 ; R28.1 5827.3,3615.16 U7.4
NetC28_1: C28.1 R15.1 U8.5 | length 118.8
  Top Layer w10: R15.1@4939.18,3538.78 C28.1 ; R15.1@4939.49,3539.09 U8.5
NetC28_2: C28.2 R29.1 U8.4 | length 135.8
  Top Layer w10: C28.2 R29.1 5010.51,3620.4 U8.4
NetC29_1: C29.1 R16.1 U9.5 | length 109.6
  Top Layer w10: C29.1@4290.21,3601.76 R16.1 4306.88,3538.82 U9.5
NetC29_2: C29.2 R30.1 U9.4 | length 144.7
  Top Layer w10: C29.2 R30.1@4337.19,3657.55 ; R30.1 4346.68,3648.06 U9.4
NetIIC1_1: IIC1.1 P1.2 | length 136.1
  Top Layer w10: P1.2@5860.86,3846.21 IIC1.1
NetIIC2_1: IIC2.1 P2.2 | length 118.5
  Top Layer w10: P2.2@5139.05,3863.78 IIC2.1
NetIIC3_1: IIC3.1 P3.2 | length 126.2
  Top Layer w10: P3.2@4390.24,3856.06 IIC3.1
NetLED1_A: LED1.A R4.1 | length 57.5
  Top Layer w11.81: R4.1 LED1.A@3638.85,3067.39
NetLM1_5: LM1.5 R44.2 | length 165.8
  Top Layer w11.81: LM1.5 R44.2@5851.84,3019.13
NetP4_2: C20.2 P4.2 U10.8 | length 491.4
  Top Layer w10: C20.2@3610.59,3416.5 U10.8 3648.06,3473.54 3730.62,3556.1 3730.62,3633.47 3759.65,3662.5 P4.2
NetR2_1: R2.1 USB.2 | length 180
  Top Layer w11.81: USB.2 3040.13,2459.57 R2.1
NetR3_1: R3.1 R5.1 USB.3 | length 319.9
  Top Layer w11.81: USB.3 3018.91,2509.21 R3.1 R5.1
NetR24_2: R24.2 U7.6 | length 93.9
  Top Layer w10: R24.2 5765.36,3515.26 U7.6
NetR25_2: R25.2 U8.6 | length 82.2
  Top Layer w10: R25.2 4963.91,3513.5 U8.6
NetR26_2: R26.2 U9.6 | length 50
  Top Layer w10: R26.2@4296.66,3513.23 U9.6
NRST: C22.2 R13.1 S1.1 U4.14 | length 858.5
  Top Layer w10: U4.14 4716.23,2205.53 4843.9,2077.86 5034.8,2077.86 5034.8,1817.86 5067.71,1784.95 R13.1 ; R13.1@5068.25,1731.14 C22.2
OSC_IN: C16.1 R10.1 U4.12 Y1.1 | length 476.1
  Top Layer w10: C16.1@4598.6,1839.11 4598.6,2034.96 4676.85,2113.22 U4.12
OSC_OUT: C17.1 R10.2 U4.13 Y1.2 | length 493.2
  Top Layer w10: U4.13 4696.54,2113.06 4798.6,2011 4798.6,1859.99 C17.1
REST1: IIC1.6 U4.52 | length 1474
  Top Layer w10: U4.52 4913.08,2950.58 4952.29,2989.79 5087.49,2989.79 5450.87,3353.17 5450.87,3574.19 5324.87,3700.19 5324.87,3833.82 5360.86,3869.81 IIC1.6
REST2: IIC2.6 U4.57 | length 1209.5
  Top Layer w10: IIC2.6 4639.05,3872.59 4600.65,3834.19 4600.65,3737.19 4726.65,3611.19 4726.65,3170.45 4814.65,3082.45 U4.57
REST3: IIC3.6 U4.62 | length 1534.6
  Top Layer w10: IIC3.6 4002.22,3870.29 4002.22,3510.52 4365.63,3147.11 4514.95,3147.11 4716.23,2945.84 U4.62
SCL1: IIC1.3 R33.1 U4.47 | length 1523.3
  Top Layer w10: U4.47 5031.14,2757.21 5222.57,2948.64 5222.57,3020.56 5498.87,3296.86 5498.87,3574.19 5624.87,3700.19 5624.87,3836.24 R33.1 5659.11,3980.52 IIC1.3
SCL2: IIC2.3 R35.1 U4.54 | length 1222.4
  Top Layer w10: U4.54@4873.35,2868.87 4873.35,3099.49 4774.65,3198.19 4774.65,3611.19 4900.65,3737.19 4900.65,3836.88 R35.1 4934.65,3977.87 IIC2.3
SCL3: IIC3.3 R37.1 U4.59 | length 1563.5
  Top Layer w10: IIC3.3 4190.24,3892.52 4190.57,3892.19 R37.1 4139.31,3820.93 4139.31,3758.1 4050.22,3669.01 4050.22,3530.4 4337.3,3243.32 4507.8,3243.32 4775.28,2975.84 U4.59
SCL4: P5.1 R39.1 U4.95 U10.6 | length 2348.1
  Top Layer w10: U10.6 3643.23,3573.54 3663.12,3593.43 3663.12,3952.26 P5.1 ; U10.6@3629.07,3571.77 3538.46,3571.77 3473.98,3507.29 3473.98,3480.61 3904.34,3050.25 v1@3904.34,2893.42 ; v1(4268.09,2424.65) 4285.68,2442.24 U4.95
  Bottom Layer w10: v1(3903.96,2893.42) 3903.96,2524.76 4004.06,2424.66 v1@4268.09,2424.66
SDA1: IIC1.4 R32.1 U4.48 | length 1492.3
  Top Layer w10: U4.48 5028.19,2776.89 5206.57,2955.27 5206.57,3063.62 5482.87,3339.92 5482.87,3622.12 5598.98,3738.23 5598.98,3830.3 R32.1 5560.55,3981.96 IIC1.4
SDA2: IIC2.4 R34.1 U4.55 | length 1178.4
  Top Layer w10: IIC2.4 4839.05,3891.01 4839.84,3890.22 R34.1 4800.65,3831.03 4800.65,3737.19 4758.65,3695.19 4758.65,3191.57 4854.02,3096.2 U4.55
SDA3: IIC3.4 R36.1 U4.60 | length 1524.2
  Top Layer w10: IIC3.4 4089.21,3981.24 R36.1 4048.78,3831.1 4048.78,3767.57 4034.22,3753.01 4034.22,3523.77 4350.26,3207.73 4516.24,3207.73 4755.6,2968.37 U4.60
SDA4: P5.2 R38.1 U4.96 U10.5 | length 2369.1
  Top Layer w10: R38.1 P5.2@3534.07,3981.31 ; U10.5@3626.33,3625.05 3536.1,3625.05 3447.8,3536.75 3447.8,3471.17 3862.73,3056.24 v1@3862.73,2883.7 ; v1(4241.56,2394.95) 4277.73,2394.95 4305.34,2422.56 U4.96
  Bottom Layer w10: v1(3861.84,2883.7) 3861.84,2507.45 3974.35,2394.95 v1(4241.56,2394.95)
START: U4.38
TCK/SWCLK: download.3 U4.76 | length 351.6
  Top Layer w11.81: download.3 4058.38,2816.26 U4.76
TEST_KEY: test.1 U4.36 | length 1661.3
  Top Layer w10: U4.36 5034.22,2540.67 5064.61,2571.06 v1(5328.54,2571.06)
  Bottom Layer w10: v1(5328.54,2571.06) 5507.25,2571.06 5857.89,2220.42 6038.42,2220.42 6179.02,2079.82 test.1@6179.02,1819.82
TMS/SWDIO: download.4 U4.72 | length 584.5
  Top Layer w11.81: download.4 4136.3,2993.69 4459.38,2993.69 4519.37,2933.7 U4.72
UPDATE_KEY: U4.35 update.1 | length 1380.1
  Top Layer w10: U4.35 5037.16,2520.98 5053.83,2537.65 v1(5328.54,2537.64)
  Bottom Layer w10: v1(5328.54,2537.64) 5493.41,2537.64 5862.18,2168.87 update.1@5862.18,1816.81
USART_RX: U4.93 VCC.4 | length 890.4
  Top Layer w10: VCC.4 4043.95,1881.57 4043.95,2284.83 4240.73,2481.61 U4.93
USART_TX: U4.92 VCC.3 | length 923.3
  Top Layer w10: VCC.3 4024.26,1891.29 4024.26,2287.77 4237.79,2501.3 U4.92
USB_5V: J2.2 sw1.1 sw1.4 USB.1 | length 1150
  Bottom Layer w27.56: sw1.1@2989,2934.8 2989,2808.82 3110.04,2687.77 3110.04,2431.05 USB.1
  Bottom Layer w39.37: sw1.1 2989.46,3007.01 3080.99,3098.54 J2.2
USBDM: R2.2 U4.70 | length 1645.5
  Top Layer w11.81: R2.2 3688.66,2459.57 3905.51,2676.42 3905.51,2806.69 3953.63,2854.81 4427.75,2854.81 4478.84,2803.72 4542.07,2803.72 4558.74,2820.39 U4.70
USBDP: R3.2 U4.71 | length 1683.2
  Top Layer w11.81: R3.2 3669.39,2509.21 3870.41,2710.23 3870.41,2822.37 4077.04,3029 4453.43,3029 4539.06,2943.37 U4.71
VCC_M1: C3.1 C23.2 R18.2 R28.2 U1.5 U7.3 | length 336.5
  Top Layer w10: R28.2 5903.68,3593.78 U7.3 5943.76,3566.44 R18.2@5959.18,3581.86 ; C23.2 R18.2@5959.18,3581.86 ; U1.5@6030.3,3582.12 R18.2 R18.2@5959.18,3581.86 ; U1.5 C3.1@6030.66,3633.67
VCC_M2: C14.1 C24.2 R19.2 R29.2 U3.5 U8.3 | length 312.7
  Top Layer w10: R29.2 5086.89,3599.02 U8.3 5122.8,3564.68 R19.2 ; C24.2@5139.86,3534.65 R19.2 ; U3.5@5201.69,3581.74 R19.2 ; U3.5 C14.1
VCC_M3: C18.1 C25.2 R20.2 R30.2 U5.5 U9.3 | length 328.8
  Top Layer w10: R30.2 4423.06,3626.68 U9.3 4467.48,3564.41 4478.08,3575.01 C25.2 ; R20.2 U5.5@4545.37,3575.4 ; U5.5 C18.1
VDD-1: P1.3 R14.2 R18.1 | length 578.8
  Top Layer w10: R14.2 5687.24,3675.7 5761.91,3750.37 ; P1.3 5761.91,3750.37 ; R18.1 5875.43,3721.13 5791.15,3721.13 5761.91,3750.37
VDD-2: P2.3 R15.2 R19.1 | length 574
  Top Layer w10: R15.2 4883.3,3654.4 4968.11,3739.21 5037.39,3739.21 ; P2.3 5037.39,3739.21 ; R19.1 5037.39,3739.21
VDD-3: P3.3 R16.2 R20.1 | length 572.3
  Top Layer w10: R16.2 4235.21,3725.14 4291.77,3781.7 ; P3.3 4291.77,3781.7 ; R20.1 4327.17,3781.7 4291.77,3781.7
VDDA: C1.1 C2.1 R1.1 U4.21 U4.22 | length 358.4
  Top Layer w10: U4.21 U4.22 4873.71,2243.98 4931.88,2185.81 R1.1
WP: P6.2 U10.7 | length 342.4
  Top Layer w10: v1(3551.8,3523.53) U10.7
  Bottom Layer w10: P6.2 3451.67,3424.22 v1@3551.39,3523.95
pads on no net: J2.3 P4.3 sw1.3 sw1.6 U1.4 U3.4 U4.1 U4.2 U4.3 U4.4 U4.5 U4.6 U4.7 U4.8 U4.9 U4.15 U4.23 U4.24 U4.25 U4.26 U4.39 U4.40 U4.41 U4.42 U4.43 U4.44 U4.45 U4.63 U4.64 U4.65 U4.66 U4.67 U4.68 U4.69 U4.73 U4.77 U4.78 U4.79 U4.80 U4.85 U4.86 U4.87 U4.88 U4.89 U4.90 U4.91 U4.97 U4.98 U5.4 U10.3 USB.5 USB.6
copper on no net: | length 675.1
  Bottom Layer w10: v1(4521.49,3001.22) 4703.71,2819.01 v1(4703.71,2401.57)

## Polygon pours and split planes (outlines as drawn)
GND on Bottom Layer "GND_L02_P002" (solid, remove dead copper, pour order 2): 2778.11,4110.86 6339.53,4110.86 6358.94,4110.86 6385.52,4084.28 6389.53,4080.27 6389.53,4060.86 6389.53,1404.96 6389.23,1404.66 6389.23,1353.88 6340.6,1353.88 6339.53,1354.96 2778.11,1354.96 2757.56,1354.96 2728.39,1384.12 2728.11,1384.4 2728.11,1404.96 2728.11,4060.86 2729.44,4062.19 2729.44,4082.68 2729.44,4087.41 2749.32,4107.29 2752.89,4110.86 2778.11,4110.86
GND on Top Layer "GND_L01_P000" (solid, remove dead copper, pour order 0): 2779.16,4110.86 6340.58,4110.86 6359.99,4110.86 6386.57,4084.28 6390.58,4080.27 6390.58,4060.86 6390.58,1404.95 6390.28,1404.65 6390.28,1353.88 6341.65,1353.88 6340.58,1354.95 2779.16,1354.95 2758.61,1354.95 2729.44,1384.12 2729.16,1384.4 2729.16,1404.95 2729.16,4060.86 2730.49,4062.19 2730.49,4082.68 2730.49,4087.41 2750.37,4107.29 2753.94,4110.86 2779.16,4110.86

## Keep-outs
Keep-Out Layer:
  lines w10: 2729.16,1427.28 2729.16,4029.44 ; 2729.16,1460.86 2729.16,1404.95 ccw(c2779.16,1404.95) 2779.16,1354.95 2805.58,1354.95 ; 2729.16,4030.86 2729.16,4060.86 cw(c2779.16,4060.86) 2779.16,4110.86 2815.58,4110.86 ; 2801.49,1354.95 6319.67,1354.95 ; 2810.58,4110.86 6310.58,4110.86 ; 6240.58,1354.95 6340.58,1354.95 ccw(c6340.58,1404.95) 6390.58,1404.95 6390.58,1475.86 ; 6270.58,4110.86 6340.58,4110.86 cw(c6340.58,4060.86) 6390.58,4060.86 6390.58,4005.86 ; 6390.58,1425.86 6390.58,4030.86

## Silkscreen, mask and mechanical layers (free items; w line width, h text height)
Top Overlay:
  circle w5: c2926.01,1551.8 r137.8
  circle w5: c2926.01,3914.01 r137.8
  circle w5: c6193.73,3914.01 r137.8
  circle w5: c6193.73,1551.8 r137.8
  text "SDA" at 3479.63,3866.76 h40
  text "SCL" at 3606.61,3865.22 h40
  text "3.3V" at 3709.59,3742.11 h40
  text "3.3V" at 3280.15,3169.44 h40
  text "Tx" at 3947.08,1727.82 h40
  text "Rx" at 4052.64,1727.21 h40

## Text inside footprints (layer, text, board x,y; h text height)
LED1: Top Overlay "A2" at 5490.03,1997.83 h39.37; Top Overlay "A1" at 5337.03,2004.83 h39.37
LED2: Top Overlay "A2" at 3923.33,2013.81 h39.37; Top Overlay "A1" at 3770.33,2020.81 h39.37
LED3: Top Overlay "A2" at 3588.31,2011.31 h39.37; Top Overlay "A1" at 3435.31,2018.31 h39.37
LM1: Top Overlay "1" at 6157.59,2885.28 h60 r180; Top Overlay "2" at 6168.23,2791.09 h60 r180; Top Overlay "9" at 5574.72,2888.43 h60 r180; Top Overlay "10" at 5584.18,2781.63 h60 r180